# Altium PCB placa.PcbDoc
Units mm, origin at the board's own origin, x right, y up, seen from the top; angles counter-clockwise.
Board outline 100.08 x 99.82 mm, 2 copper layers (Top Layer, Bottom Layer); 16 components, 24 nets, 132 pads, 0 vias.
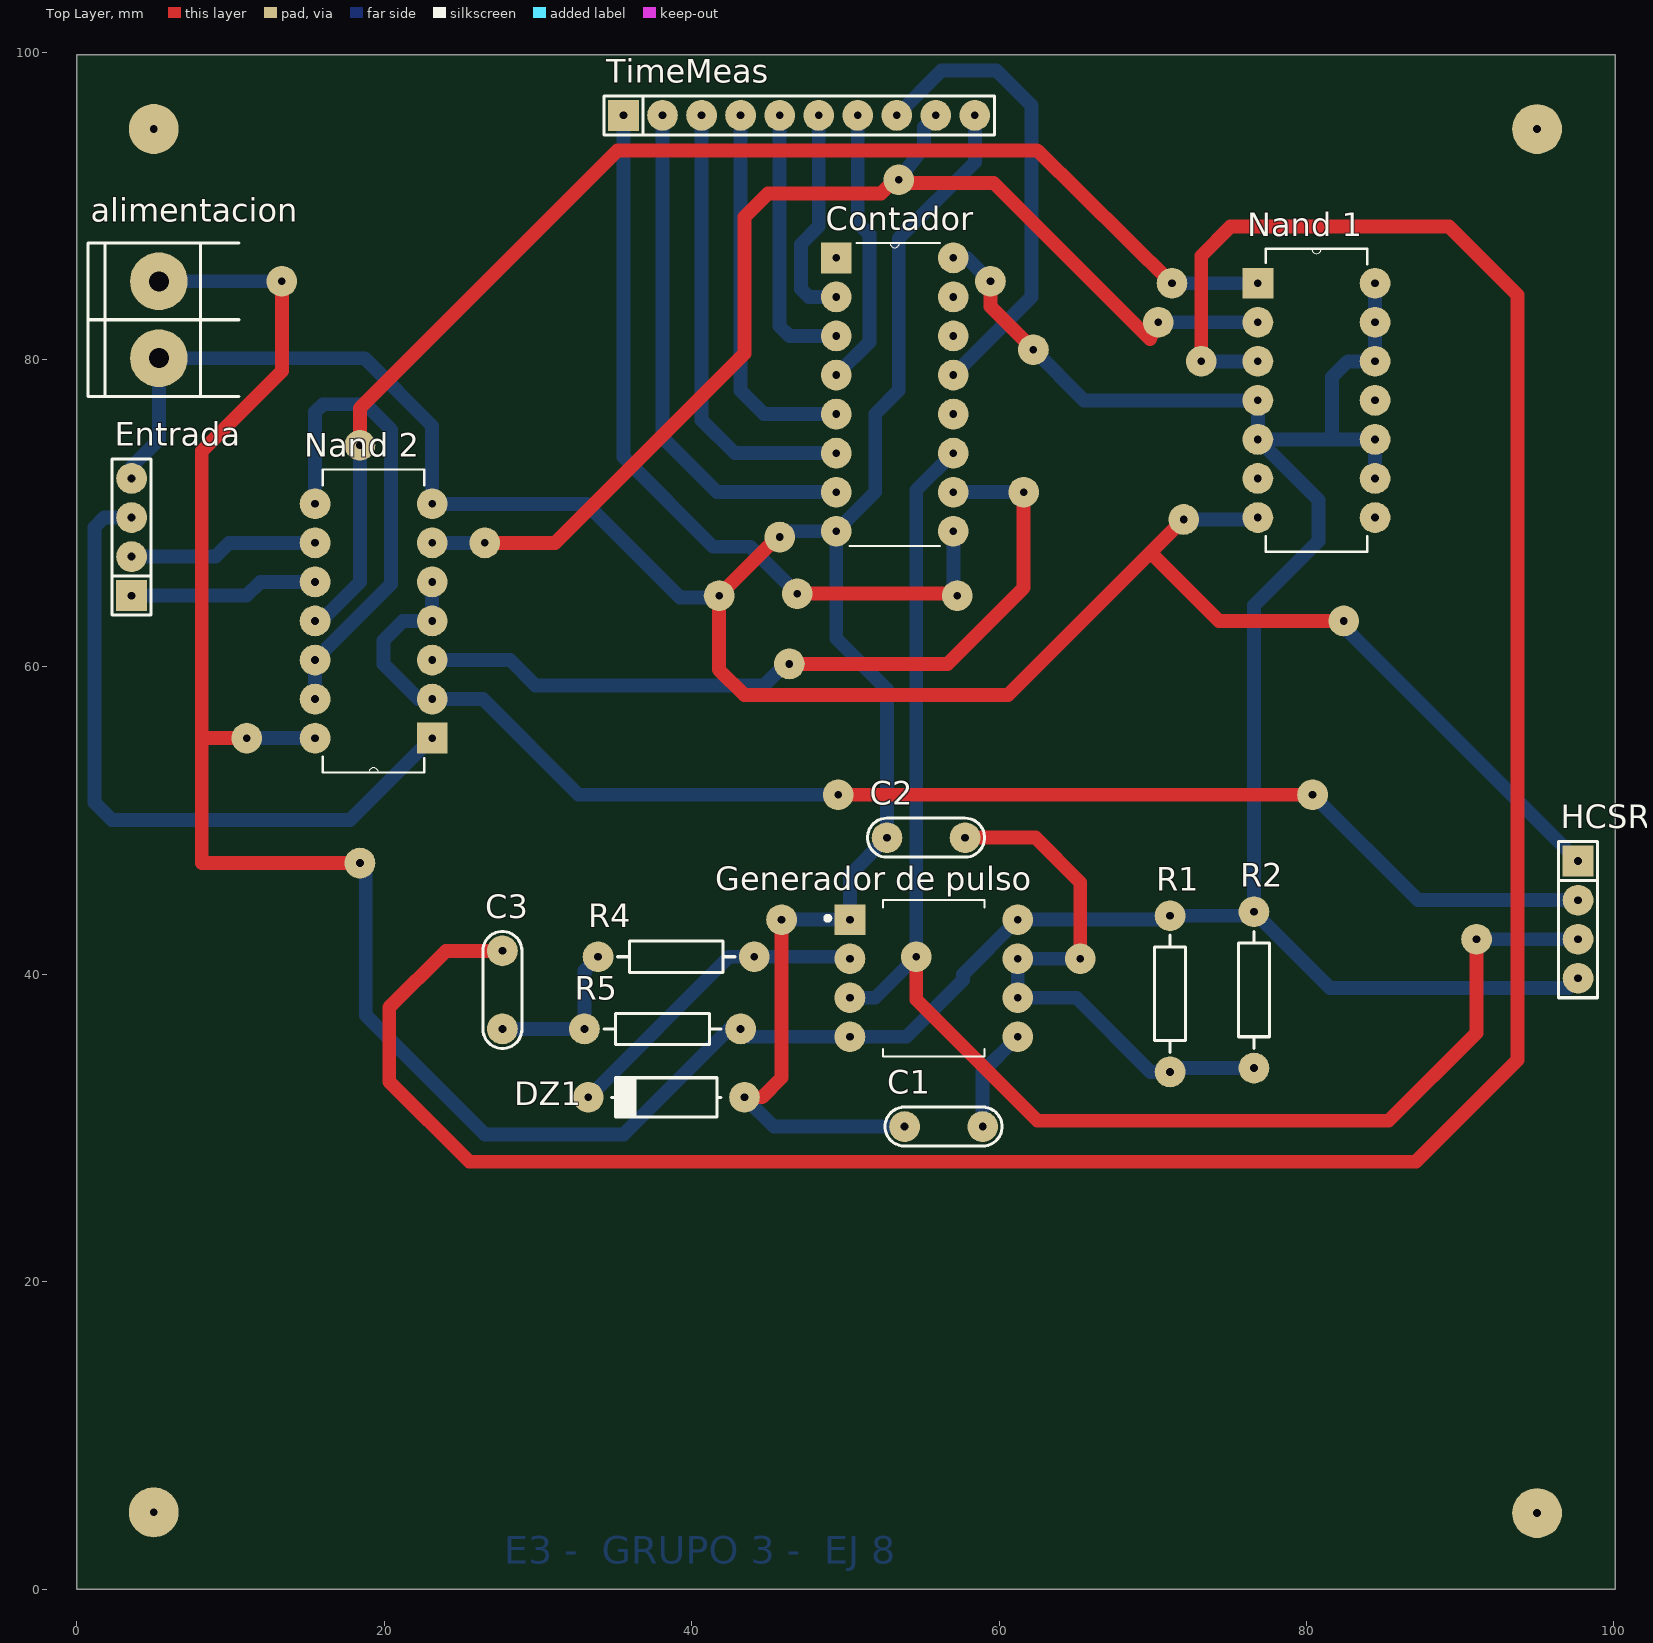
[diagram p0: Top Layer view]
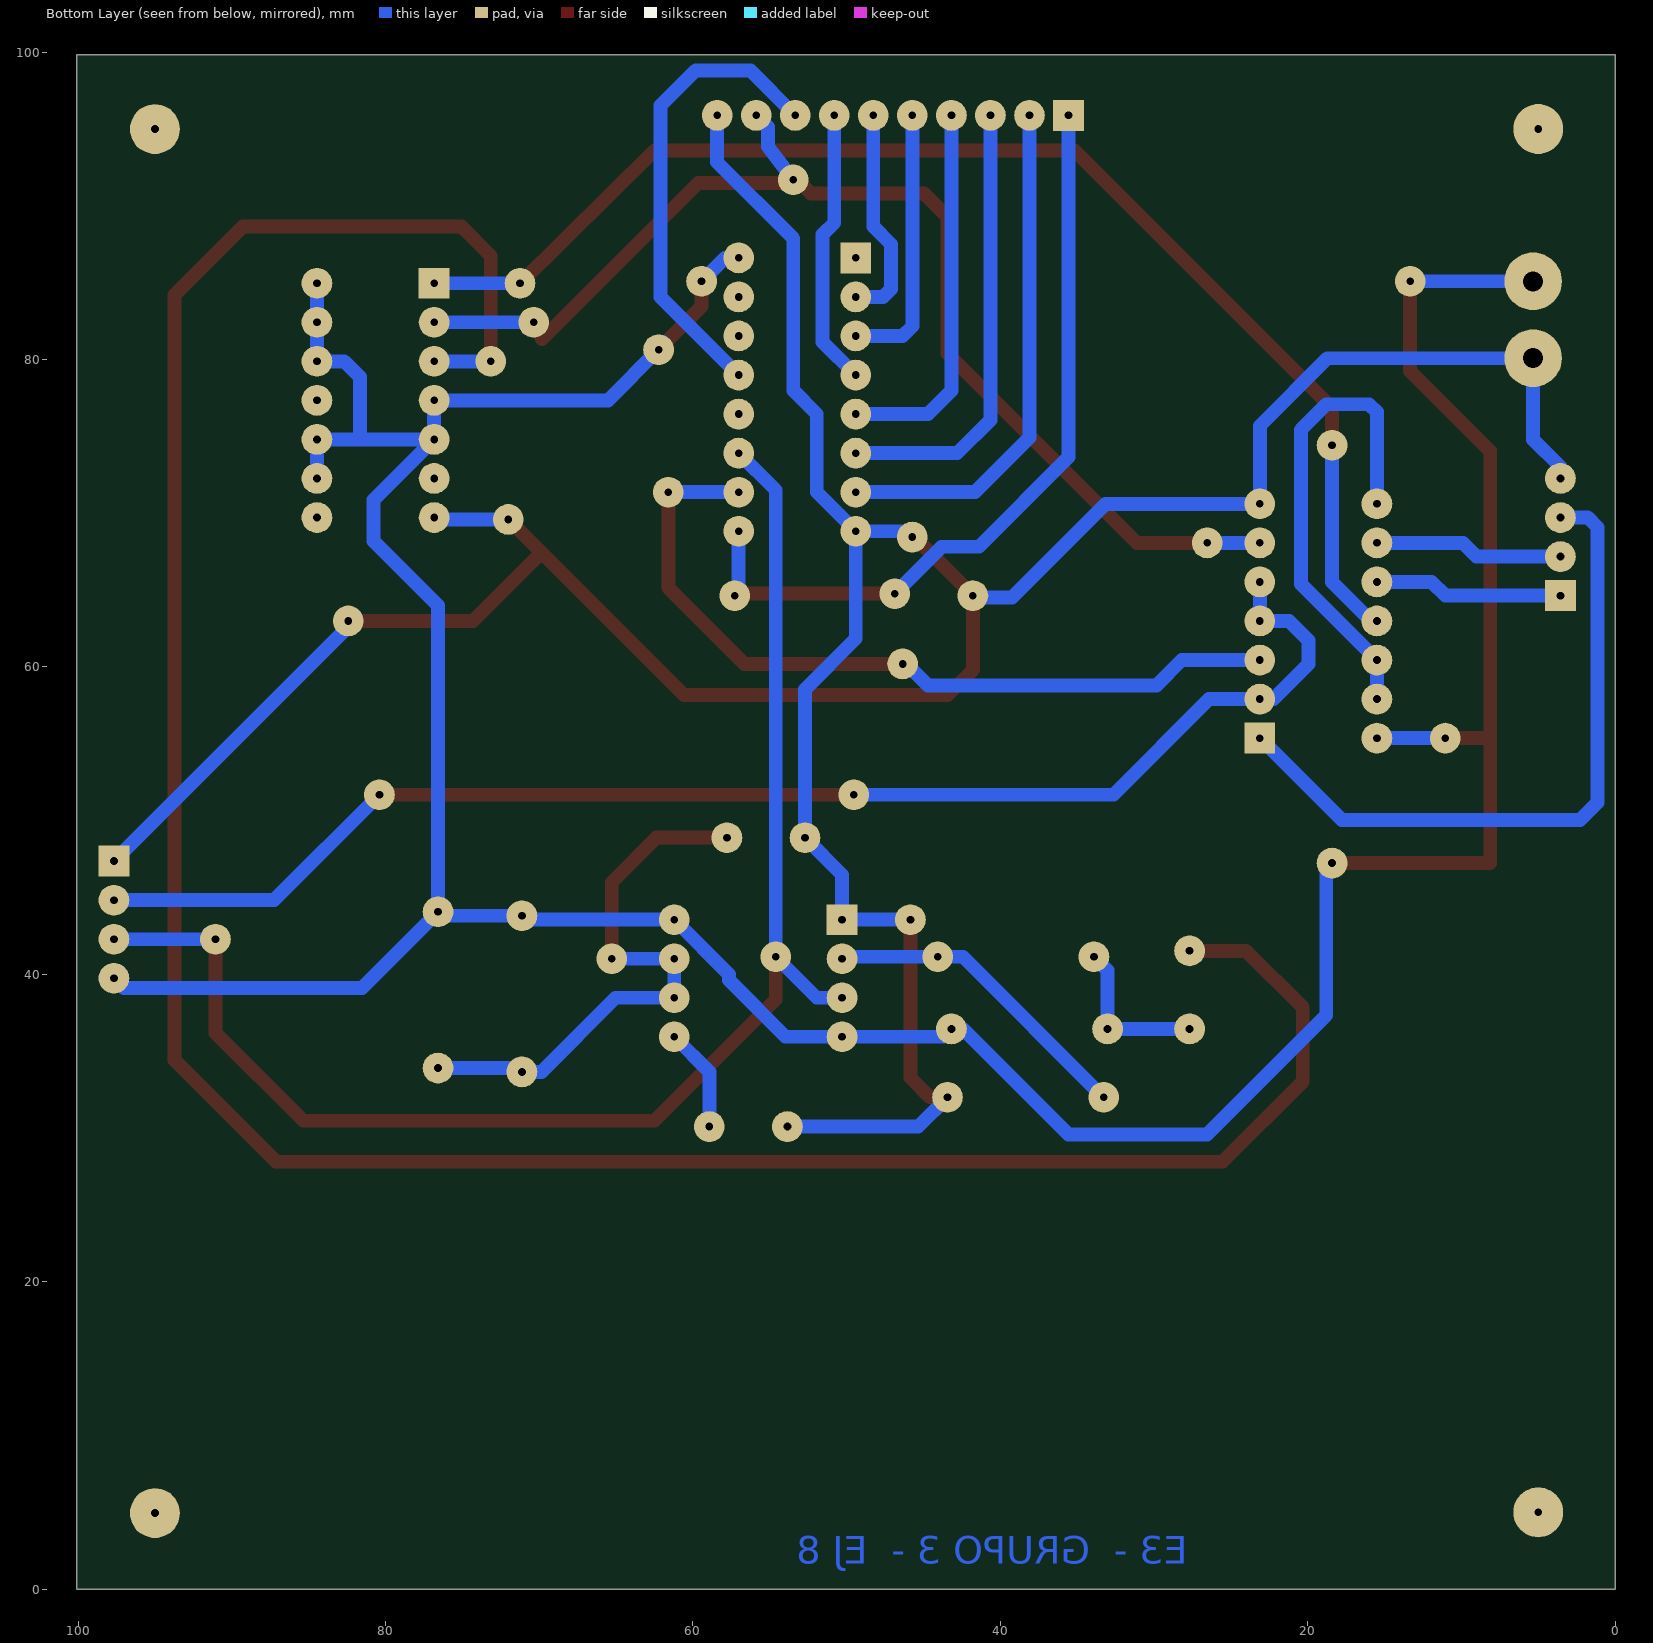
[diagram p1: Bottom Layer view, seen from below]

## Layer stack, top to bottom
Top Solder: solder mask 0.0102, Solder Resist, Dk 3.5
Top Layer: signal copper 0.0356
Dielectric 1: dielectric 0.32, FR-4, Dk 4.8
Bottom Layer: signal copper 0.0356
Bottom Solder: solder mask 0.0102, Solder Resist, Dk 3.5

## Board outline
0,0 0,99.822 100.076,99.822 100.076,0

## Design rules (kind name [scope] priority, off if disabled: settings)
Clearance [All] p1: gap=0.3 ignorepadtopadclearanceinfootprint=FALSE
PolygonConnect [All] p1: connectstyle=Relief reliefconductorwidth=0.254 reliefentries=4 polygonreliefangle="90 Angle" airgapwidth=0.254
RoutingVias [All] p1: holewidth=0.711 width=1.27 viastyle="Through Hole" minholewidth=0.711 minwidth=1.27 maxholewidth=0.711 maxwidth=1.27
SolderMaskExpansion [All] p1: expansion=0.102
Width [All] p1: maxlimit=0.9 minlimit=0.9 preferedwidth=0.9
30 further rules are at their usual default settings.

## Classes and differential pairs
component class esquematico_medidorDigital: C1 C2 C3 DZ1 Entrada "Generador de pulso" HCSR04 "Nand 1" R1 R2 R4 R5 TimeMeas

## Components (designator, comment, footprint, x,y, rotation, side; value= is the part's Value field where it differs from the comment)
alimentacion "BORNERA 2" BORNERA2 5.334,82.59 r0 top
C1 "CAP" CAP200 56.388,30.099 r180 top
C2 "CAP" CAP200 55.245,48.895 r180 top
C3 "CAP" CAP200 27.686,38.989 r270 top
Contador "CD74HC4040E" DIP254P762X508-16 57.023,68.834 r0 top
DZ1 "DIODO ZENER" DO41 38.354,32.004 r180 top locked
Entrada "CON4" SIP4 3.556,68.453 r90 top locked
"Generador de pulso" "NE555P" DIP1092W45P254L1016H508Q8 55.753,39.751 r0 top
HCSR04 "CON4" SIP4 97.663,43.561 r270 top locked
"Nand 1" "SN74HC00N" DIP254P762X508-14 84.455,69.723 r0 top
"Nand 2" "SN74HC00N" DIP254P762X508-14 15.494,70.612 r180 top
R1 "RES" RES400 71.12,33.655 r90 top
R2 "RES" RES400 76.581,33.909 r90 top
R4 "RES" RES400 44.069,41.148 r180 top
R5 "RES" RES400 43.18,36.449 r180 top
TimeMeas "CON10" SIP10 35.56,95.885 r0 top locked

## Footprints (in the part's own frame and the unit in brackets; to place one, negate y for a bottom-side part, rotate by r counter-clockwise, add the part's x,y. Pads: shape width x height; smd on the part's side, far side on the other; paste and mask are expansions set on the pad)
BORNERA2 [mm] "Bornera con Tornillos 5mm separación"
  round 3.75 hole 1.3: 1(0,2.5) 2(0,-2.5)
  silkscreen extent -4.6,-5 5.2,5, body extent -3.76,-4.89 3.94,5.61, height 10
CAP200 [mm]
  round 2 hole 0.5: 1(-2.54,0) 2(2.54,0)
  silkscreen extent -3.81,-1.27 3.81,1.27, body extent -2.79,-1.17 2.79,1.12, height 6.24
DIP254P762X508-14 [mm]
  rect 2x2 hole 0.5: 1(-7.62,15.24)
  round 2 hole 0.5: 2(-7.62,12.7) 3(-7.62,10.16) 4(-7.62,7.62) 5(-7.62,5.08) 6(-7.62,2.54) 7(-7.62,0) 8(0,0) 9(0,2.54) 10(0,5.08) 11(0,7.62) 12(0,10.16) 13(0,12.7) 14(0,15.24)
  silkscreen extent -7.11,-2.24 -0.51,17.48
DIP254P762X508-16 [mm]
  rect 2x2 hole 0.5: 1(-7.62,17.78)
  round 2 hole 0.5: 2(-7.62,15.24) 3(-7.62,12.7) 4(-7.62,10.16) 5(-7.62,7.62) 6(-7.62,5.08) 7(-7.62,2.54) 8(-7.62,0) 9(0,0) 10(0,2.54) 11(0,5.08) 12(0,7.62) 13(0,10.16) 14(0,12.7) 15(0,15.24) 16(0,17.78)
  silkscreen extent -6.73,-0.97 -0.89,18.75
DIP1092W45P254L1016H508Q8 [mm]
  rect 2x2 hole 0.5: 1(-5.46,3.81)
  round 2 hole 0.5: 2(-5.46,1.27) 3(-5.46,-1.27) 4(-5.46,-3.81) 5(5.46,-3.81) 6(5.46,-1.27) 7(5.46,1.27) 8(5.46,3.81)
  silkscreen extent -7.04,-5.08 3.3,5.08
DO41 [mm]
  round 2 hole 0.5 unplated mask+0.102: 1(-5.08,0) 2(5.08,0)
  silkscreen extent -3.56,-1.27 3.56,1.27, body extent -5.46,-1.19 5.46,1.37, height 2.03
RES400 [mm]
  round 2 hole 0.5: 1(0,0) 2(10.16,0)
  silkscreen extent 1.27,-1.02 8.89,1.02, body extent -0.3,-1.14 10.46,1.17, height 2.43
SIP4 [mm]
  rect 2x2 hole 0.5 unplated mask+0.102: 1(-3.81,0)
  round 2 hole 0.5 unplated mask+0.102: 2(-1.27,0) 3(1.27,0) 4(3.81,0)
  silkscreen extent -5.08,-1.27 5.08,1.27, body extent -5.08,-1.27 5.08,1.27, height 8.38
SIP10 [mm]
  rect 2x2 hole 0.5 unplated mask+0.102: 1(0,0)
  round 2 hole 0.5 unplated mask+0.102: 2(2.54,0) 3(5.08,0) 4(7.62,0) 5(10.16,0) 6(12.7,0) 7(15.24,0) 8(17.78,0) 9(20.32,0) 10(22.86,0)
  silkscreen extent -1.27,-1.27 24.13,1.27, body extent -1.27,-1.3 24.13,1.27, height 8.38

## Part data
Contador: "High Speed CMOS Logic 12-Stage Binary Counter 16-PDIP -55 to 125", Package="PDIP-16 Texas Instruments", Availability=Unavailable, MF="Texas Instruments", MP=CD74HC4040E, Price=None, SnapEDA_Link=https://www.snapeda.com/parts/CD74HC4040E/Texas%20Instruments/view-part/?ref=snap
"Generador de pulso": Package="PDIP-8 STMicroelectronics", Digi-Key_Part_Number=296-1411-5-ND, Digi-Key_Purchase_URL=https://www.digikey.com.ar/product-detail/en/texas-instruments/NE555P/296-1411-5-ND/277057?utm_source=snapeda&utm_medium=aggregator&utm_campaign=symbol, MF="Texas Instruments", MP=NE555P, SnapEDA_Link=https://www.snapeda.com/parts/NE555P/Texas%20Instruments/view-part/?ref=snap
"Nand 1" "Nand 2": "NAND Gate 4-Element 2-IN CMOS 14-Pin PDIP NAND Gate 4-Element 2-IN CMOS 14-Pin PDIP NAND Gate 4-Element 2-IN CMOS 14-...", Package="DIP-14 Texas Instruments", Availability=Unavailable, MF="Texas Instruments", MP=SN74HC00N, Price=None, SnapEDA_Link=https://www.snapeda.com/parts/SN74HC00N/Texas%20Instruments/view-part/?ref=snap

## Free pads (board coordinates)
  round 3.25 hole 0.5: 1(5,95) 3(5,5) 4(94.996,4.953) 5(94.996,94.996)
  round 2 hole 0.5: 6(18.415,47.244) 7(11.049,55.372) 8(13.335,85.09) 9(13.335,85.09) 11(65.278,41.021) 12(54.61,41.148) 13(54.61,41.148) 14(91.059,42.291) 15(91.059,42.291) 16(45.847,43.561) 17(45.847,43.561) 18(57.277,64.643) 19(57.277,64.643) 20(46.863,64.77) 21(46.863,64.77) 23(53.467,91.694) 24(26.543,68.072) 25(26.543,68.072) 27(18.415,74.422) 28(71.247,84.963) 30(70.358,82.423) 31(62.23,80.645) 32(62.23,80.645) 33(59.436,85.09) 34(59.436,85.09) 37(45.72,68.453) 38(45.72,68.453) 39(41.783,64.643) 40(41.783,64.643) 41(72.009,69.596) 42(72.009,69.596) 43(82.423,62.992) 45(61.595,71.374) 46(61.595,71.374) 49(46.355,60.198) 50(46.355,60.198) 51(49.53,51.689) 53(80.391,51.689) 54(80.391,51.689) 55(73.152,79.883)

## Nets (pads, with @x,y where several pads share a name; then routed paths per layer and width w, separated by ;. In a path a pad name is that pad's centre, name@x,y a point inside that pad or via, vN(x,y) a via of type N, cw(c..) or ccw(c..) an arc to the next point about the centre after c; other vN are vias at no path point)
clk: "Nand 2.1" Entrada.3 | length 45.2
  Bottom Layer w0.9: Entrada.3 1.778,69.723 1.143,69.088 1.143,51.181 2.286,50.038 17.78,50.038 23.114,55.372
echo: "Nand 2.2" "Nand 2.4" "Nand 2.5" HCSR04.2 pad.51 pad.53 pad.54 | length 91.9
  Top Layer w0.9: pad.51 pad.54
  Bottom Layer w0.9: 23.114,65.532 23.114,62.992 21.209,62.992 19.939,61.722 19.939,60.198 22.225,57.912 23.114,57.912 26.416,57.912 32.639,51.689 pad.51 ; pad.54 87.249,44.831 HCSR04.2
GND: "Generador de pulso.1" "Nand 1.7" "Nand 2.7" alimentacion.2 C1.2 C2.2 Contador.8 DZ1.1 Entrada.4 HCSR04.1 pad.16 pad.17 pad.37 pad.38 pad.39 pad.40 pad.41 pad.42 pad.43 TimeMeas.10 | length 233.4
  Top Layer w0.9: DZ1.1 44.577,32.004 45.847,33.274 pad.17 ; pad.38 45.593,68.453 pad.40 41.783,59.817 43.434,58.166 60.579,58.166 69.85,67.437 ; pad.42@72.136,69.723 pad.42 69.85,67.437 ; pad.43 74.295,62.992 69.85,67.437
  Bottom Layer w0.9: Entrada.4 3.556,73.025 5.334,74.803 alimentacion.2 18.716,80.09 23.114,75.692 23.114,70.612 33.147,70.612 39.243,64.516 pad.40@41.91,64.516 ; DZ1.1 45.339,30.099 C1.2 ; pad.38 46.101,68.834 Contador.8 ; pad.17@45.847,43.688 pad.17 50.293,43.561 50.293,46.483 C2.2 52.705,58.547 49.403,61.849 Contador.8 ; TimeMeas.10 58.42,92.837 53.467,87.884 53.467,77.978 51.943,76.454 51.943,71.374 Contador.8 ; pad.42 76.708,69.596 76.835,69.723 ; pad.43@82.042,62.992 HCSR04.1
measOk: "Nand 1.2" "Nand 2.6" pad.23 pad.24 pad.25 pad.30 TimeMeas.9 | length 79.2
  Top Layer w0.9: pad.25 31.115,68.072 43.434,80.391 43.434,89.281 44.958,90.805 52.324,90.805 53.467,91.948 pad.23 53.718,91.478 59.652,91.478 69.808,81.322 pad.30
  Bottom Layer w0.9: 23.114,68.072 pad.25 26.67,68.072 pad.25@26.67,68.199 ; pad.23 55.118,93.853 55.118,95.123 TimeMeas.9 ; pad.30@70.485,82.423 76.835,82.423
NetC1_1: "Generador de pulso.5" C1.1 | length 6.8
  Bottom Layer w0.9: C1.1 58.928,33.656 61.213,35.941
NetC2_1: "Generador de pulso.6" "Generador de pulso.7" C2.1 pad.11 R1.1 R2.1 | length 38
  Top Layer w0.9: C2.1 62.357,48.895 65.278,45.974 pad.11
  Bottom Layer w0.9: pad.11@65.532,41.021 pad.11 61.213,41.021 61.213,38.481 65.024,38.481 69.85,33.655 R1.1 71.374,33.909 R2.1
NetC3_1: "Nand 1.3" C3.1 pad.55 | length 175.5
  Top Layer w0.9: C3.1 24.003,41.529 20.32,37.846 20.32,33.02 25.527,27.813 87.122,27.813 93.726,34.417 93.726,84.201 89.281,88.646 75.057,88.646 73.152,86.741 pad.55
  Bottom Layer w0.9: pad.55 76.835,79.883
NetC3_2: C3.2 R4.2 R5.2 | length 10.4
  Bottom Layer w0.9: C3.2 R5.2 33.02,40.259 R4.2
NetContador_2: Contador.2 TimeMeas.6 | length 14.3
  Bottom Layer w0.9: TimeMeas.6 48.26,88.646 47.117,87.503 47.117,84.582 47.625,84.074 Contador.2
NetContador_3: Contador.3 TimeMeas.5 | length 17.7
  Bottom Layer w0.9: TimeMeas.5 45.72,82.169 46.355,81.534 Contador.3
NetContador_4: Contador.4 TimeMeas.7 | length 18.1
  Bottom Layer w0.9: Contador.4 51.562,81.153 51.562,88.138 50.8,88.9 TimeMeas.7
NetContador_5: Contador.5 TimeMeas.4 | length 24.8
  Bottom Layer w0.9: TimeMeas.4 43.18,77.978 44.704,76.454 Contador.5
NetContador_6: Contador.6 TimeMeas.3 | length 29.5
  Bottom Layer w0.9: TimeMeas.3 40.64,76.073 42.799,73.914 Contador.6
NetContador_7: Contador.7 TimeMeas.2 | length 33.7
  Bottom Layer w0.9: TimeMeas.2 38.1,74.93 41.656,71.374 Contador.7
NetContador_9: Contador.9 pad.18 pad.19 pad.20 pad.21 TimeMeas.1 | length 52
  Top Layer w0.9: pad.21 57.15,64.77 pad.19
  Bottom Layer w0.9: TimeMeas.1 35.56,73.66 41.402,67.818 43.815,67.818 pad.21 ; Contador.9 57.023,64.897 pad.19
NetContador_10: "Nand 2.3" Contador.10 pad.45 pad.46 pad.49 pad.50 | length 52.3
  Top Layer w0.9: pad.50 56.642,60.198 61.595,65.151 pad.46
  Bottom Layer w0.9: 23.114,60.452 28.194,60.452 29.845,58.801 44.704,58.801 pad.50@46.101,60.198 ; Contador.10 pad.46
NetContador_13: Contador.13 TimeMeas.8 | length 30.6
  Bottom Layer w0.9: TimeMeas.8 56.261,98.806 59.817,98.806 62.103,96.52 62.103,84.074 Contador.13
"NetNand 1_1": "Nand 1.1" "Nand 2.11" pad.27 pad.28 | length 84.6
  Top Layer w0.9: pad.27 18.415,76.835 35.179,93.599 62.486,93.599 pad.28
  Bottom Layer w0.9: 15.494,62.992 15.875,62.992 18.415,65.532 pad.27 pad.27@18.415,74.803 ; pad.28 76.835,84.963
"NetNand 2_8": "Nand 2.8" "Nand 2.12" "Nand 2.13" | length 31.4
  Bottom Layer w0.9: 15.494,57.912 15.494,60.452 20.447,65.405 20.447,75.438 18.796,77.089 16.002,77.089 15.494,76.581 15.494,70.612
trigEn: "Nand 2.9" Entrada.2 | length 12.3
  Bottom Layer w0.9: Entrada.2 9.017,67.183 9.906,68.072 15.494,68.072
trigIn: "Nand 2.10" Entrada.1 | length 12.3
  Bottom Layer w0.9: Entrada.1 11.049,64.643 11.938,65.532 15.494,65.532
trigMeas: "Generador de pulso.2" DZ1.2 R4.1 | length 20.9
  Bottom Layer w0.9: DZ1.2 42.418,41.148 R4.1 50.166,41.148 50.293,41.021
trigSensor: "Generador de pulso.3" Contador.11 HCSR04.3 pad.12 pad.13 pad.14 pad.15 | length 97
  Top Layer w0.9: pad.13 54.61,38.354 62.484,30.48 85.344,30.48 91.059,36.195 pad.15
  Bottom Layer w0.9: 50.293,38.481 51.943,38.481 pad.13 54.61,71.501 Contador.11 ; pad.15@90.805,42.291 pad.15 HCSR04.3
VCC: "Generador de pulso.4" "Generador de pulso.8" "Nand 1.4" "Nand 1.5" "Nand 1.9" "Nand 1.10" "Nand 1.12" "Nand 1.13" "Nand 1.14" "Nand 2.14" alimentacion.1 Contador.16 HCSR04.4 pad.6 pad.7 pad.8 pad.9 pad.31 pad.32 pad.33 pad.34 R1.2 R2.2 R5.1 | length 251.7
  Top Layer w0.9: pad.7 8.382,55.372 8.128,55.626 ; pad.9 13.335,79.248 8.128,74.041 8.128,55.626 ; pad.6 8.128,47.244 8.128,55.626 ; pad.34 59.436,83.439 pad.32
  Bottom Layer w0.9: alimentacion.1 pad.9 pad.9@13.462,85.217 ; pad.7@10.795,55.372 pad.7 15.494,55.372 ; pad.6 18.796,46.863 18.796,37.338 26.543,29.591 35.56,29.591 42.418,36.449 R5.1 43.688,35.941 50.293,35.941 53.975,35.941 57.658,39.624 57.658,40.006 61.213,43.561 70.866,43.561 R1.2 76.327,43.815 R2.2 ; Contador.16 57.912,86.614 pad.34 ; pad.32@61.976,81.153 61.976,80.899 pad.32 65.532,77.343 76.835,77.343 76.835,74.803 ; 84.455,72.263 84.455,74.803 81.661,74.803 ; 84.455,84.963 84.455,82.423 84.455,79.883 82.677,79.883 81.661,78.867 81.661,74.803 ; HCSR04.4 97.028,39.116 81.534,39.116 R2.2 ; R2.2 76.581,64.008 80.772,68.199 80.772,70.866 76.835,74.803 ; 76.835,74.803 81.661,74.803
pads on no net: "Nand 1.6" "Nand 1.8" "Nand 1.11" Contador.1 Contador.12 Contador.14 Contador.15

## Other copper
Bottom Layer:
  text "E3 -  GRUPO 3 -  EJ 8" at 27.813,1.651 h1.8